# Altium PCB fuse_board.PcbDoc
Units mil, origin at the board's own origin, x right, y up, seen from the top; angles counter-clockwise.
Board outline 5300 x 1800 mil, 2 copper layers (Top Layer, Bottom Layer); 48 components, 31 nets, 118 pads, 10 vias.
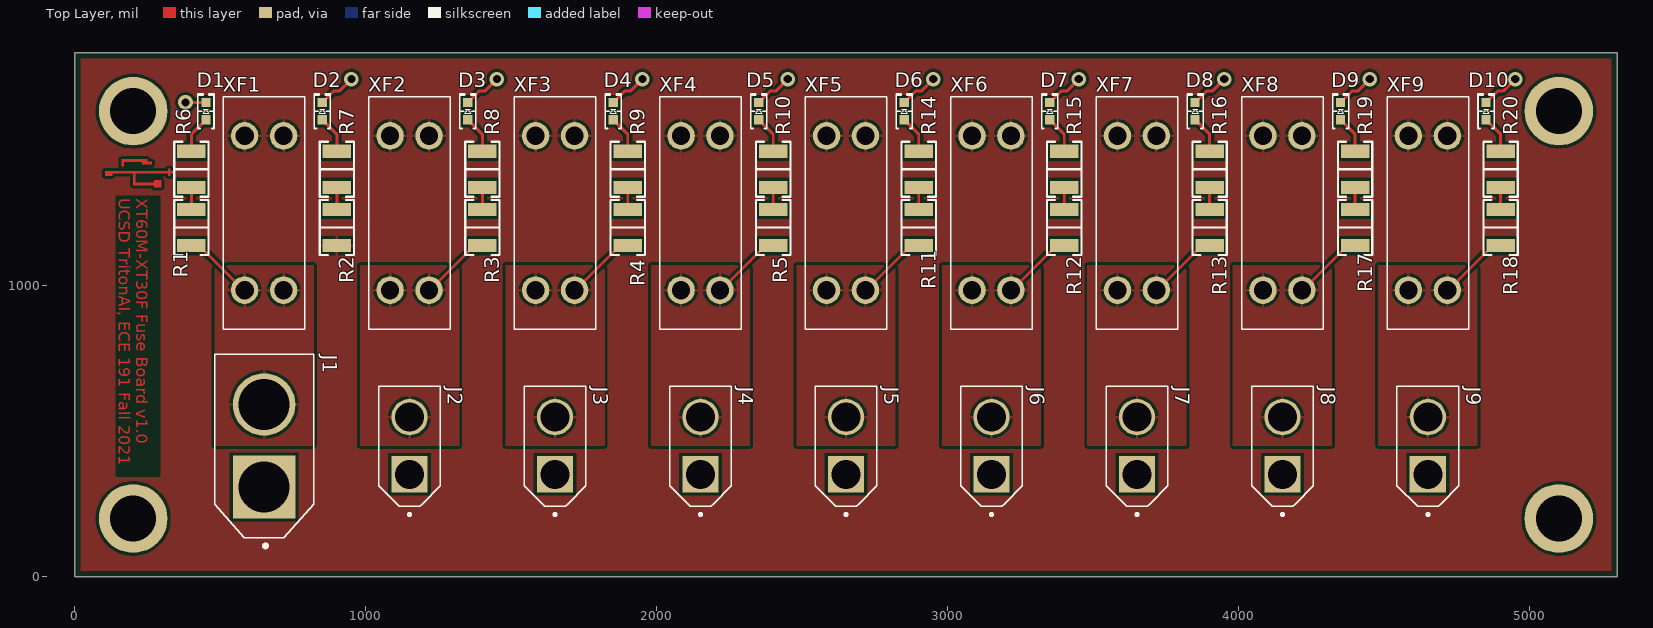
[diagram p0: Top Layer view]
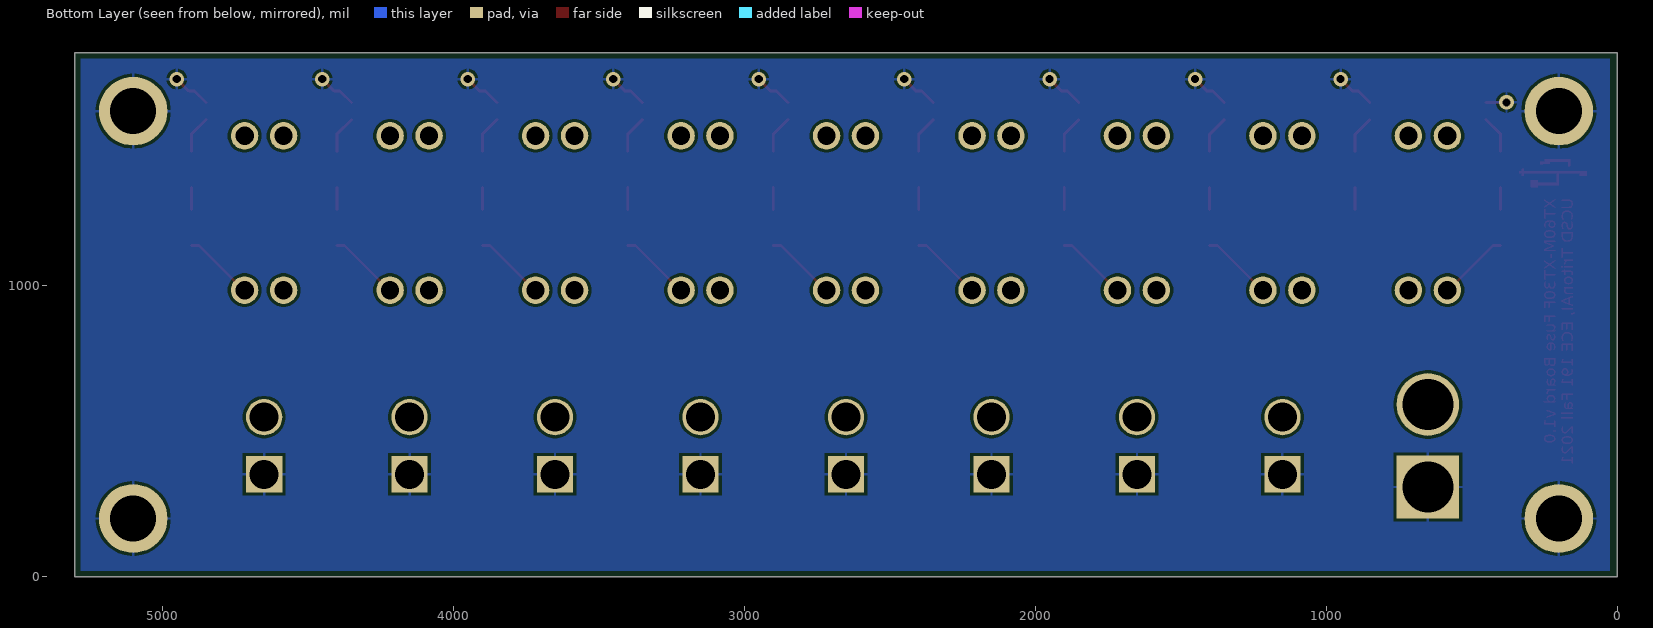
[diagram p1: Bottom Layer view, seen from below]
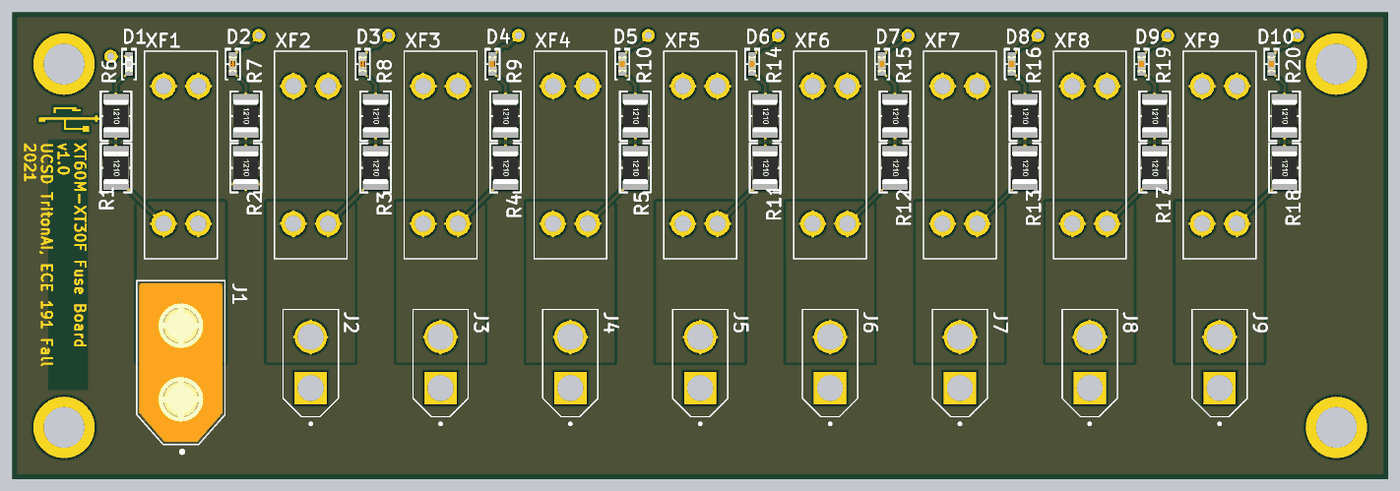
[diagram p2: 3D render of the assembled board from above, using the file's embedded part models]

## Layer stack, top to bottom
Top Solder: solder mask 0.4, Solder Resist, Dk 3.5
Top Layer: signal copper 1.4
Dielectric 1: dielectric 12.6, FR-4, Dk 4.8
Bottom Layer: signal copper 1.4
Bottom Solder: solder mask 0.4, Solder Resist, Dk 3.5

## Board outline
0,0 5300,0 5300,1800 0,1800

## Design rules (kind name [scope] priority, off if disabled: settings)
Clearance [All] p1: gap=10 ignorepadtopadclearanceinfootprint=FALSE except(0: Arc-Hole Track-Hole SMDPad-Hole THPad-Hole Via-Hole Fill-Hole Poly-Hole Region-Hole Text-Hole)
PolygonConnect [All] p1: connectstyle=Relief reliefconductorwidth=10 reliefentries=4 polygonreliefangle="90 Angle" airgapwidth=10
RoutingVias [All] p1: holewidth=28 width=50 viastyle="Through Hole" minholewidth=28 minwidth=50 maxholewidth=28 maxwidth=50
SolderMaskExpansion [All] p1: expansion=4 istentingtop=FALSE
Width [All] p1: maxlimit=50 minlimit=10 preferedwidth=10
30 further rules are at their usual default settings.

## Components (designator, comment, footprint, x,y, rotation, side; value= is the part's Value field where it differs from the comment)
D1 "Green" "LED 0603_1608 GREEN" 450,1600 r90 top
D2 "Red" "LED 0603_1608 RED" 850,1600 r90 top
D3 "Red" "LED 0603_1608 RED" 1350,1600 r90 top
D4 "Red" "LED 0603_1608 RED" 1850,1600 r90 top
D5 "Red" "LED 0603_1608 RED" 2350,1600 r90 top
D6 "Red" "LED 0603_1608 RED" 2850,1600 r90 top
D7 "Red" "LED 0603_1608 RED" 3350,1600 r90 top
D8 "Red" "LED 0603_1608 RED" 3850,1600 r90 top
D9 "Red" "LED 0603_1608 RED" 4350,1600 r90 top
D10 "Red" "LED 0603_1608 RED" 4850,1600 r90 top
J1 "XT60-M" AMASS_XT60-M 650,450 r90 top
J2 "XT30U-F" AMASS_XT30-M 1150,450 r90 top
J3 "XT30U-F" AMASS_XT30-M 1650,450 r90 top
J4 "XT30U-F" AMASS_XT30-M 2150,450 r90 top
J5 "XT30U-F" AMASS_XT30-M 2650,450 r90 top
J6 "XT30U-F" AMASS_XT30-M 3150,450 r90 top
J7 "XT30U-F" AMASS_XT30-M 3650,450 r90 top
J8 "XT30U-F" AMASS_XT30-M 4150,450 r90 top
J9 "XT30U-F" AMASS_XT30-M 4650,450 r90 top
R1 "1.2 kOhms" "RES 1210_3225" 400,1200 r270 top
R2 "1.2 kOhms" "RES 1210_3225" 900,1200 r270 top
R3 "1.2 kOhms" "RES 1210_3225" 1400,1200 r270 top
R4 "1.2 kOhms" "RES 1210_3225" 1900,1200 r270 top
R5 "1.2 kOhms" "RES 1210_3225" 2400,1200 r270 top
R6 "1.2 kOhms" "RES 1210_3225" 400,1400 r270 top
R7 "1.2 kOhms" "RES 1210_3225" 900,1400 r270 top
R8 "1.2 kOhms" "RES 1210_3225" 1400,1400 r270 top
R9 "1.2 kOhms" "RES 1210_3225" 1900,1400 r270 top
R10 "1.2 kOhms" "RES 1210_3225" 2400,1400 r270 top
R11 "1.2 kOhms" "RES 1210_3225" 2900,1200 r270 top
R12 "1.2 kOhms" "RES 1210_3225" 3400,1200 r270 top
R13 "1.2 kOhms" "RES 1210_3225" 3900,1200 r270 top
R14 "1.2 kOhms" "RES 1210_3225" 2900,1400 r270 top
R15 "1.2 kOhms" "RES 1210_3225" 3400,1400 r270 top
R16 "1.2 kOhms" "RES 1210_3225" 3900,1400 r270 top
R17 "1.2 kOhms" "RES 1210_3225" 4400,1200 r270 top
R18 "1.2 kOhms" "RES 1210_3225" 4900,1200 r270 top
R19 "1.2 kOhms" "RES 1210_3225" 4400,1400 r270 top
R20 "1.2 kOhms" "RES 1210_3225" 4900,1400 r270 top
XF1 "3557-2" FUSE_3557-2 650,1250 r90 top
XF2 "3557-2" FUSE_3557-2 1150,1250 r270 top
XF3 "3557-2" FUSE_3557-2 1650,1250 r270 top
XF4 "3557-2" FUSE_3557-2 2150,1250 r270 top
XF5 "3557-2" FUSE_3557-2 2650,1250 r270 top
XF6 "3557-2" FUSE_3557-2 3150,1250 r270 top
XF7 "3557-2" FUSE_3557-2 3650,1250 r270 top
XF8 "3557-2" FUSE_3557-2 4150,1250 r270 top
XF9 "3557-2" FUSE_3557-2 4650,1250 r270 top

## Footprints (in the part's own frame and the unit in brackets; to place one, negate y for a bottom-side part, rotate by r counter-clockwise, add the part's x,y. Pads: shape width x height; smd on the part's side, far side on the other; paste and mask are expansions set on the pad)
AMASS_XT30-M [mm]
  rect 3.175x3.175 hole 2.54: 1(-2.5,0)
  round 3.175 hole 2.54: 2(2.5,0)
  silkscreen extent -6.1,-2.7 5.2,2.7, body extent -5.08,-2.54 5.08,2.54, height 9.4
AMASS_XT60-M [mil]
  rect 215x215 hole 175: 1(-141.73,0)
  round 215 hole 175: 2(141.73,0)
  silkscreen extent -350,-170 315,170, body extent -305,-159 305,159, height 630
FUSE_3557-2 [mm]
  round 2.4 hole 1.6: 1(-6.735,-1.7) 1(-6.735,1.7) 2(6.735,-1.7) 2(6.735,1.7)
  silkscreen extent -10.16,-3.56 10.16,3.56, body extent -9.91,-3.38 9.91,3.38, height 7.4
"LED 0603_1608 GREEN" [mm] "Chip Diode, 2-Leads, Body 1.60x0.80mm, IPC Medium Density"
  rect 0.8x0.8 smd: 1(-0.75,0) 2(0.75,0)
  silkscreen extent -1.52,-0.7 1.52,0.7, body extent -0.8,-0.4 0.8,0.4, height 0.53
"LED 0603_1608 RED" [mm] "Chip Diode, 2-Leads, Body 1.60x0.80mm, IPC Medium Density"
  rect 0.8x0.8 smd: 1(-0.75,0) 2(0.75,0)
  silkscreen extent -1.52,-0.7 1.52,0.7, body extent -0.8,-0.4 0.8,0.4, height 0.53
"RES 1210_3225" [mm] "Chip Resistor, 2-Leads, Body 3.1x2.6mm, IPC Medium Density"
  rect 1.15x2.5 smd: 1(-1.575,0) 2(1.575,0)
  silkscreen extent -2.4,-1.5 2.4,1.5, body extent -1.6,-1.25 1.6,1.25, height 0.7

## Part data
D1: library part LTST-C193TGKT-5A, "LED GREEN CLEAR CHIP SMD", Current - Test=5mA, Device Package="0603 (1608 Metric)", Lens Color=Colorless, Manufacturer="Lite-On Inc.", Millicandela Rating=154mcd, Supplier Device Package="Chip LED", Supplier Part Number 1=160-1832-1-ND, Voltage - Forward (Vf) (Typ)=2.8V, Color=Green, ComponentLink1Description=Datasheet, ComponentLink1URL=//media.digikey.com/pdf/Data%20Sheets/Lite-On%20PDFs/LTST-C193TGKT-5A.pdf, ComponentLink2Description="DigiKey Link", ComponentLink2URL=http://digikey.com/product-detail/en/lite-on-inc/LTST-C193TGKT-5A/160-1832-1-ND/2356255, Configuration=Standard, Height (Max)=0.45mm, LastUpdated="9/2/2020 1:20:42 AM", Lens Size="1.15mm x 0.80mm", Lens Style="Rectangle with Flat Top", Lens Transparency=Clear, Lifecycle Status=Active, Minimum Order=1, Mounting Type="Surface Mount", Package / Case="0603 (1608 Metric)", Packaging=TapeAndReel, Part Number=LTST-C193TGKT-5A, Part Status=Active, PartId=644, Price=0.10, Series=-, Size / Dimension="1.60mm L x 0.80mm W", Supplier 1=DigiKey, Viewing Angle=130°, Wavelength - Dominant=528nm, Wavelength - Peak=525nm
D2 D3 D4 D5 D6 D7 D8 D9 D10: library part 19-217/R6C-AL1M2VY/3T, "LED RED CLEAR 2SMD", Current - Test=5mA, Device Package="0603 (1608 Metric)", Lens Color=Colorless, Manufacturer="Everlight Electronics Co Ltd", Supplier Device Package=2-SMD, Supplier Part Number 1=1080-1585-1-ND, Voltage - Forward (Vf) (Typ)=1.95V, Color=Red, ComponentLink1Description=Datasheet, ComponentLink1URL=//media.digikey.com/pdf/Data%20Sheets/Everlight%20PDFs/19-217-R6C-AL1M2VY-3T.pdf, ComponentLink2Description="DigiKey Link", ComponentLink2URL=http://digikey.com/product-detail/en/everlight-electronics-co-ltd/19-217-R6C-AL1M2VY-3T/1080-1585-1-ND/8535308, Configuration=Standard, Height (Max)=0.50mm, LastUpdated="9/2/2020 1:20:56 AM", Lens Size="1.00mm x 0.80mm", Lens Style="Rectangle with Flat Top", Lens Transparency=Clear, Lifecycle Status=Active, Minimum Order=1, Mounting Type="Surface Mount", Package / Case="0603 (1608 Metric)", Packaging=TapeAndReel, Part Number=19-217/R6C-AL1M2VY/3T, Part Status=Active, PartId=419, Price=0.05, Series=-, Size / Dimension="1.60mm L x 0.80mm W", Supplier 1=DigiKey, Viewing Angle=120°, Wavelength - Peak=632nm
J1: "Plug; DC supply; XT60; male; PIN: 2; for cable; soldered; 30A; 500V", Package="Package Analog Devices", Availability=Unavailable, MF=AMASS, MP=XT60-M, Price=None, SnapEDA_Link=https://www.snapeda.com/parts/XT60-M/AMASS/view-part/2883912/?ref=snap
J2 J3 J4 J5 J6 J7 J8 J9: "Plug; DC supply; XT30; female; PIN: 2; for cable; soldering; 15A", Package="Package Analog Devices", Availability=Unavailable, MF=AMASS, MP=XT60-M, Price=None, SnapEDA_Link=https://www.snapeda.com/parts/XT60-M/AMASS/view-part/2883912/?ref=snap
R1 R2 R3 R4 R5 R6 R7 R8 R9 R10 R11 R12 R13 R14 R15 R16 R17 R18 R19 R20: library part ERJ-14YJ122U, "RES SMD 1.2K OHM 5% 1/2W 1210", Device Package="1210 (3225 Metric)", Manufacturer="Panasonic Electronic Components", Operating Temperature="-55°C ~ 155°C", Power (Watts)="0.5W, 1/2W", Ratings=AEC-Q200, Supplier Device Package=1210, Supplier Part Number 1=P1.2KVDKR-ND, Temperature Coefficient=±200ppm/°C, Tolerance=±5%, ComponentLink1Description=Datasheet, ComponentLink1URL=https://b2b-api.panasonic.eu/file_stream/pids/fileversion/1242, ComponentLink2Description="DigiKey Link", ComponentLink2URL=http://digikey.com/product-detail/en/panasonic-electronic-components/ERJ-14YJ122U/P1.2KVDKR-ND/1808556, Composition="Thick Film", Features="Automotive AEC-Q200", Height - Seated (Max)="0.028\" (0.70mm)", LastUpdated="9/2/2020 1:26:24 AM", Lifecycle Status=Active, Minimum Order=1, Number of Terminations=2, Package / Case="1210 (3225 Metric)", Packaging=TapeAndReel, Part Number=ERJ-14YJ122U, Part Status=Active, Price=0.02, Resistance="1.2 kOhms", Series=ERJ, Size / Dimension="0.126\" L x 0.098\" W (3.20mm x 2.50mm)", Supplier 1=DigiKey
XF1 XF2 XF3 XF4 XF5 XF6 XF7 XF8 XF9: "Fuse Block 30A 500V 1 Circuit Blade Through Hole", Package="Nonstandard Keystone", Availability=Unavailable, MF="Keystone Electronics", MP=3557-2, Price=None, SnapEDA_Link=https://www.snapeda.com/parts/3557-2/Keystone%20Electronics/view-part/278060/?ref=snap

## Free pads (board coordinates)
  round 236.22 hole 157.48: ""(200,200) ""(200,1600) ""(5100,200) ""(5100,1600)

## Via types
v1: diameter 50, hole 28, Top Layer to Bottom Layer, 10 vias

## Nets (pads, with @x,y where several pads share a name; then routed paths per layer and width w, separated by ;. In a path a pad name is that pad's centre, name@x,y a point inside that pad or via, vN(x,y) a via of type N, cw(c..) or ccw(c..) an arc to the next point about the centre after c; other vN are vias at no path point)
GND: D1.2 D2.2 D3.2 D4.2 D5.2 D6.2 D7.2 D8.2 D9.2 D10.2 J1.1 J2.1 J3.1 J4.1 J5.1 J6.1 J7.1 J8.1 J9.1 pad. | length 1270.2
  Top Layer w10: v1(380,1630) 449.53,1630 D1.2 ; D2.2 889.08,1668.61 908.61,1668.61 v1(950,1710) ; D3.2 1389.08,1668.61 1408.61,1668.61 v1(1450,1710) ; D4.2 1889.08,1668.61 1908.61,1668.61 v1(1950,1710) ; D5.2 2389.08,1668.61 2408.61,1668.61 v1(2450,1710) ; D6.2 2889.08,1668.61 2908.61,1668.61 v1(2950,1710) ; D7.2 3389.08,1668.61 3408.61,1668.61 v1(3450,1710) ; D8.2 3889.08,1668.61 3908.61,1668.61 v1(3950,1710) ; D9.2 4389.08,1668.61 4408.61,1668.61 v1(4450,1710) ; D10.2 4889.08,1668.61 4908.61,1668.61 v1(4950,1710)
NetD1_1: D1.1 R6.1 | length 129.2
  Top Layer w10: R6.1 400,1520.47 D1.1
NetD2_1: D2.1 R7.1 | length 129.2
  Top Layer w10: D2.1 900,1520.47 R7.1
NetD3_1: D3.1 R8.1 | length 129.2
  Top Layer w10: D3.1 1400,1520.47 R8.1
NetD4_1: D4.1 R9.1 | length 129.2
  Top Layer w10: D4.1 1900,1520.47 R9.1
NetD5_1: D5.1 R10.1 | length 129.2
  Top Layer w10: D5.1 2400,1520.47 R10.1
NetD6_1: D6.1 R14.1 | length 129.2
  Top Layer w10: D6.1 2900,1520.47 R14.1
NetD7_1: D7.1 R15.1 | length 129.2
  Top Layer w10: D7.1 3400,1520.47 R15.1
NetD8_1: D8.1 R16.1 | length 129.2
  Top Layer w10: D8.1 3900,1520.47 R16.1
NetD9_1: D9.1 R19.1 | length 129.2
  Top Layer w10: D9.1 4400,1520.47 R19.1
NetD10_1: D10.1 R20.1 | length 129.2
  Top Layer w10: D10.1 4900,1520.47 R20.1
NetR1_1: R1.1 R6.2 | length 76
  Top Layer w10: R1.1 R6.2
NetR2_1: R2.1 R7.2 | length 76
  Top Layer w10: R2.1 R7.2
NetR3_1: R3.1 R8.2 | length 76
  Top Layer w10: R3.1 R8.2
NetR4_1: R4.1 R9.2 | length 76
  Top Layer w10: R4.1 R9.2
NetR5_1: R5.1 R10.2 | length 76
  Top Layer w10: R5.1 R10.2
NetR11_1: R11.1 R14.2 | length 76
  Top Layer w10: R11.1 R14.2
NetR12_1: R12.1 R15.2 | length 76
  Top Layer w10: R12.1 R15.2
NetR13_1: R13.1 R16.2 | length 76
  Top Layer w10: R13.1 R16.2
NetR17_1: R17.1 R19.2 | length 76
  Top Layer w10: R17.1 R19.2
NetR18_1: R18.1 R20.2 | length 76
  Top Layer w10: R18.1 R20.2
OUT1: J2.2 R3.2 XF2.2 | length 246.5
  Top Layer w10: XF2.2@1216.93,984.84 1220.28,984.84 1373.43,1137.99 R3.2
OUT2: J3.2 R4.2 XF3.2 | length 246.5
  Top Layer w10: XF3.2@1716.93,984.84 1720.28,984.84 1873.43,1137.99 R4.2
OUT3: J4.2 R5.2 XF4.2 | length 246.5
  Top Layer w10: XF4.2@2216.93,984.84 2220.28,984.84 2373.43,1137.99 R5.2
OUT4: J5.2 R11.2 XF5.2 | length 246.5
  Top Layer w10: XF5.2@2716.93,984.84 2720.28,984.84 2873.43,1137.99 R11.2
OUT5: J6.2 R12.2 XF6.2 | length 246.5
  Top Layer w10: XF6.2@3216.93,984.84 3220.28,984.84 3373.43,1137.99 R12.2
OUT6: J7.2 R13.2 XF7.2 | length 246.5
  Top Layer w10: XF7.2@3716.93,984.84 3720.28,984.84 3873.43,1137.99 R13.2
OUT7: J8.2 R17.2 XF8.2 | length 246.5
  Top Layer w10: XF8.2@4216.93,984.84 4220.28,984.84 4373.43,1137.99 R17.2
OUT8: J9.2 R18.2 XF9.2 | length 246.5
  Top Layer w10: XF9.2@4716.93,984.84 4720.28,984.84 4873.43,1137.99 R18.2
VCC: R2.2 XF1.2 XF2.1 XF3.1 XF4.1 XF5.1 XF6.1 XF7.1 XF8.1 XF9.1
VIN: J1.2 R1.2 XF1.1 | length 246.5
  Top Layer w10: R1.2 426.57,1137.99 579.72,984.84 XF1.1@583.07,984.84

## Polygon pours and split planes (outlines as drawn)
VIN on Top Layer "VIN_L01_P000" (solid, pour order 0): 820,450 820,1070 480,1070 480,450
VCC on Top Layer "VCC_L01_P009" (solid, pour order 9): 20,1780.02 20,20 5280,20 5280,1780
OUT1 on Top Layer "OUT1_L01_P001" (solid, pour order 1): 1320,450 1320,1070 980,1070 980,450
OUT2 on Top Layer "OUT2_L01_P002" (solid, pour order 2): 1820,450 1820,1070 1480,1070 1480,450
OUT8 on Top Layer "OUT8_L01_P008" (solid, pour order 8): 4820,450 4820,1070 4480,1070 4480,450
OUT7 on Top Layer "OUT7_L01_P007" (solid, pour order 7): 4320,450 4320,1070 3980,1070 3980,450
OUT6 on Top Layer "OUT6_L01_P006" (solid, pour order 6): 3820,450 3820,1070 3480,1070 3480,450
OUT5 on Top Layer "OUT5_L01_P005" (solid, pour order 5): 3320,450 3320,1070 2980,1070 2980,450
OUT4 on Top Layer "OUT4_L01_P004" (solid, pour order 4): 2820,450 2820,1070 2480,1070 2480,450
OUT3 on Top Layer "OUT3_L01_P003" (solid, pour order 3): 2320,450 2320,1070 1980,1070 1980,450
GND on Bottom Layer "GND_L02_P010" (solid, pour order 10): 5280,20 5280,1780 25,1780 25,20

## Other copper
Top Layer:
  region: 256,1418 248,1418 240,1418 232,1418 232,1426 224,1426 216,1426 208,1426 200,1426 192,1426 184,1426 176,1426 168,1426 168,1410 160,1410 160,1434 168,1434 176,1434 184,1434 192,1434 200,1434 208,1434 216,1434 224,1434 232,1434 240,1434 248,1434 248,1426 256,1426 264,1426 264,1418
  region: 328,1386 328,1378 320,1378 320,1386 312,1386 304,1386 296,1386 288,1386 280,1386 272,1386 264,1386 256,1386 248,1386 240,1386 232,1386 224,1386 216,1386 208,1386 208,1354 216,1354 224,1354 232,1354 240,1354 248,1354 256,1354 264,1354 272,1354 272,1362 280,1362 288,1362 296,1362 296,1338 288,1338 280,1338 272,1338 272,1346 264,1346 256,1346 248,1346 240,1346 232,1346 224,1346 216,1346 208,1346 200,1346 200,1386 192,1386 184,1386 176,1386 168,1386 160,1386 152,1386 144,1386 136,1386 128,1386 128,1378 120,1378 112,1378 104,1378 104,1394 112,1394 120,1394 128,1394 136,1394 144,1394 152,1394 160,1394 168,1394 176,1394 184,1394 192,1394 200,1394 208,1394 216,1394 224,1394 232,1394 240,1394 248,1394 256,1394 264,1394 272,1394 280,1394 288,1394 296,1394 304,1394 312,1394 320,1394 320,1402 328,1402 328,1394 336,1394 336,1386
  text "XT60M-XT30F Fuse Board v1.0 / UCSD TritonAI, ECE 191 Fall 2021" at 150,1300 h40 r270

## Silkscreen, mask and mechanical layers (free items; w line width, h text height)
Top Solder:
  region: 328,1386 328,1378 320,1378 320,1386 312,1386 304,1386 296,1386 288,1386 280,1386 272,1386 264,1386 256,1386 248,1386 240,1386 232,1386 224,1386 216,1386 208,1386 208,1354 216,1354 224,1354 232,1354 240,1354 248,1354 256,1354 264,1354 272,1354 272,1362 280,1362 288,1362 296,1362 296,1338 288,1338 280,1338 272,1338 272,1346 264,1346 256,1346 248,1346 240,1346 232,1346 224,1346 216,1346 208,1346 200,1346 200,1386 192,1386 184,1386 176,1386 168,1386 160,1386 152,1386 144,1386 136,1386 128,1386 128,1378 120,1378 112,1378 104,1378 104,1394 112,1394 120,1394 128,1394 136,1394 144,1394 152,1394 160,1394 168,1394 176,1394 184,1394 192,1394 200,1394 208,1394 216,1394 224,1394 232,1394 240,1394 248,1394 256,1394 264,1394 272,1394 280,1394 288,1394 296,1394 304,1394 312,1394 320,1394 320,1402 328,1402 328,1394 336,1394 336,1386
  region: 256,1418 248,1418 240,1418 232,1418 232,1426 224,1426 216,1426 208,1426 200,1426 192,1426 184,1426 176,1426 168,1426 168,1410 160,1410 160,1434 168,1434 176,1434 184,1434 192,1434 200,1434 208,1434 216,1434 224,1434 232,1434 240,1434 248,1434 248,1426 256,1426 264,1426 264,1418
  text "XT60M-XT30F Fuse Board v1.0 / UCSD TritonAI, ECE 191 Fall 2021" at 150,1300 h40 r270